# Altium PCB CoilGun_PCB.PcbDoc (part 1 of 2)
Units mm, origin at the board's own origin, x right, y up, seen from the top; angles counter-clockwise.
Board outline 78 x 72 mm, 2 copper layers (Top Layer, Bottom Layer), stack 1.594 mm thick; 79 components, 60 nets, 239 pads, 58 vias.
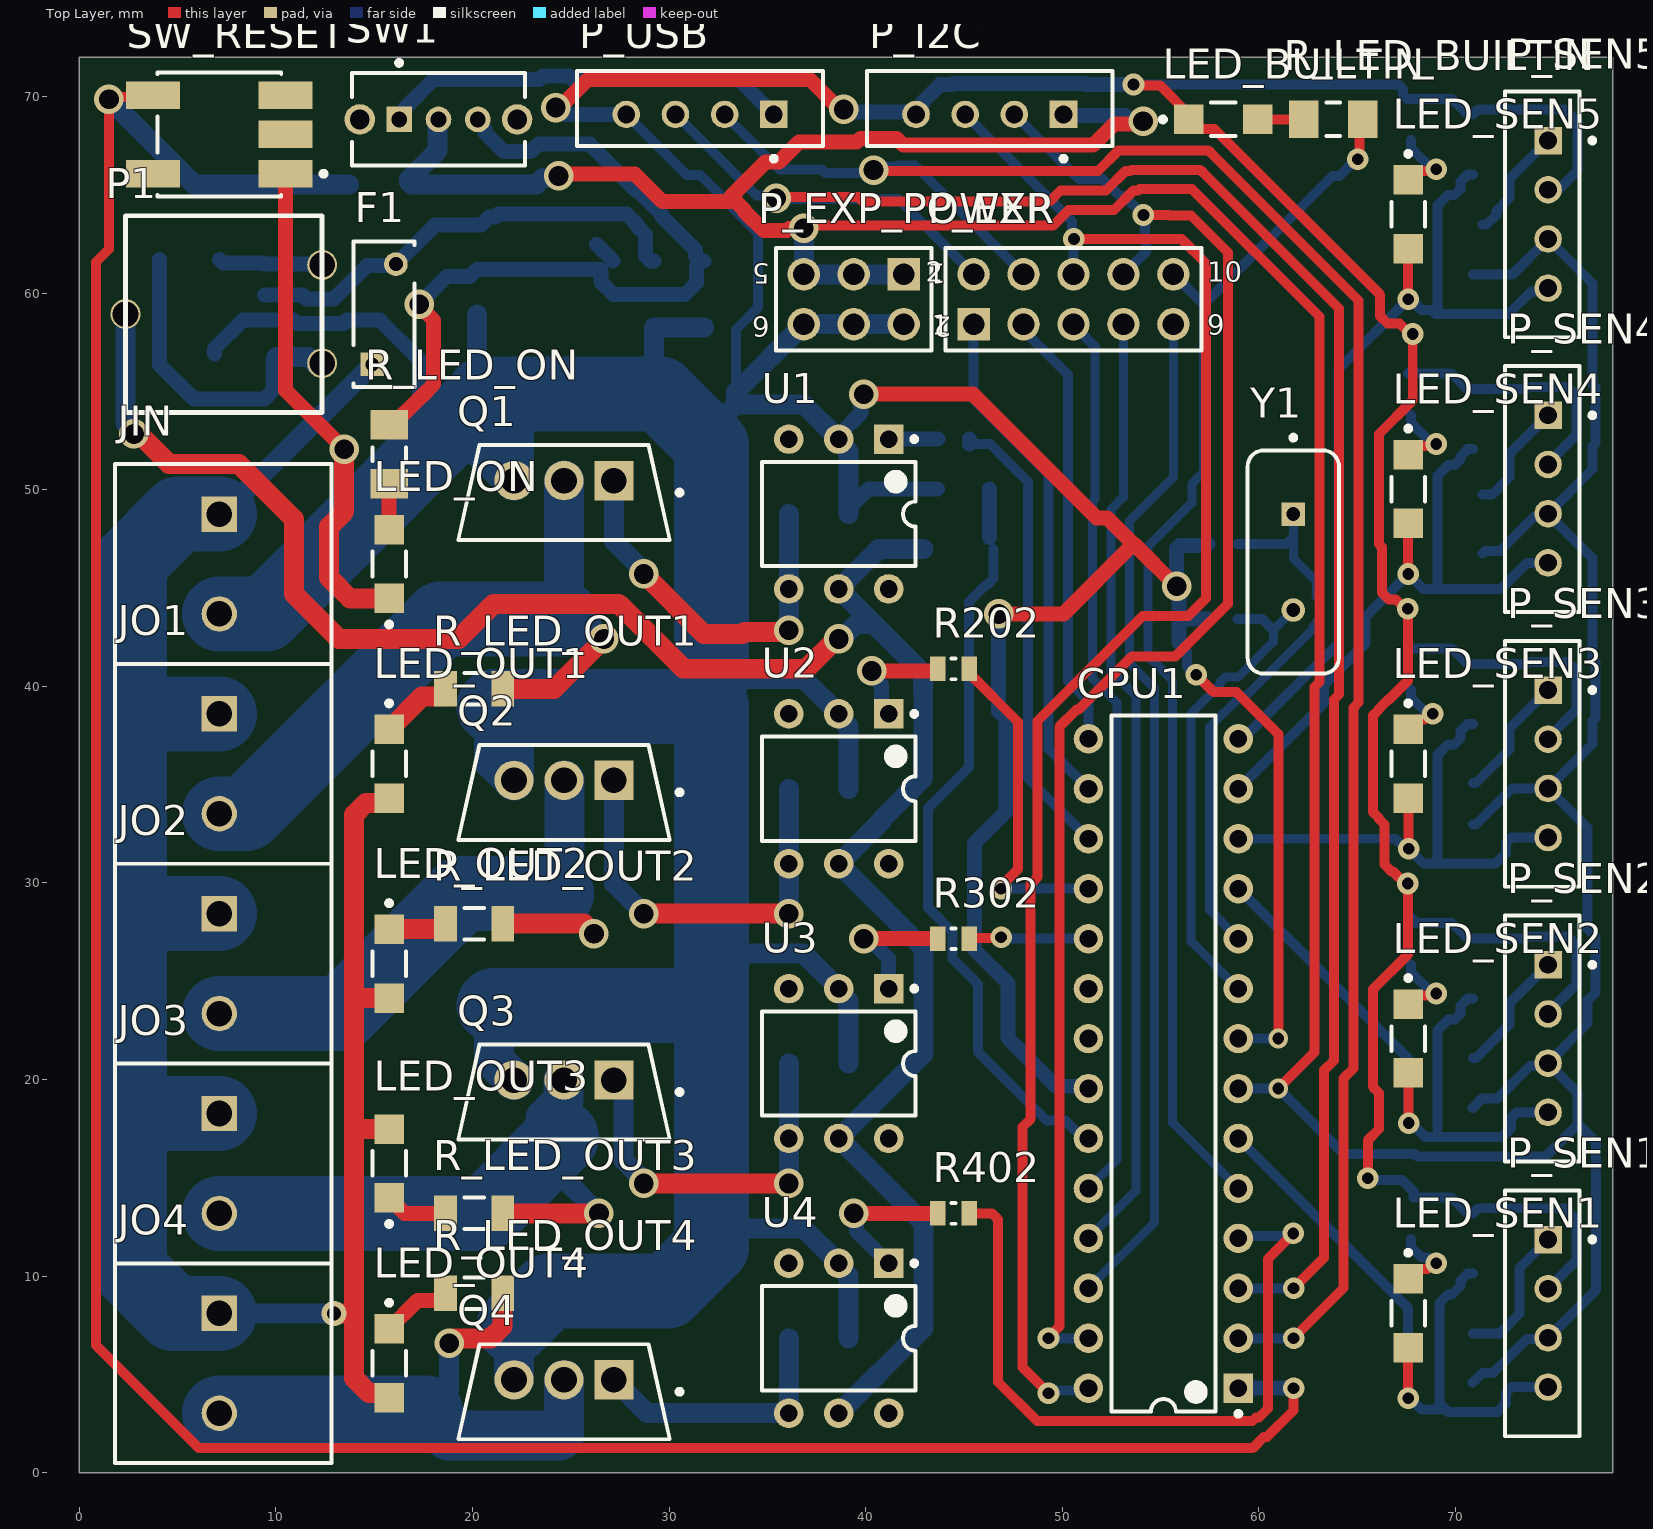
[diagram p0: Top Layer view]
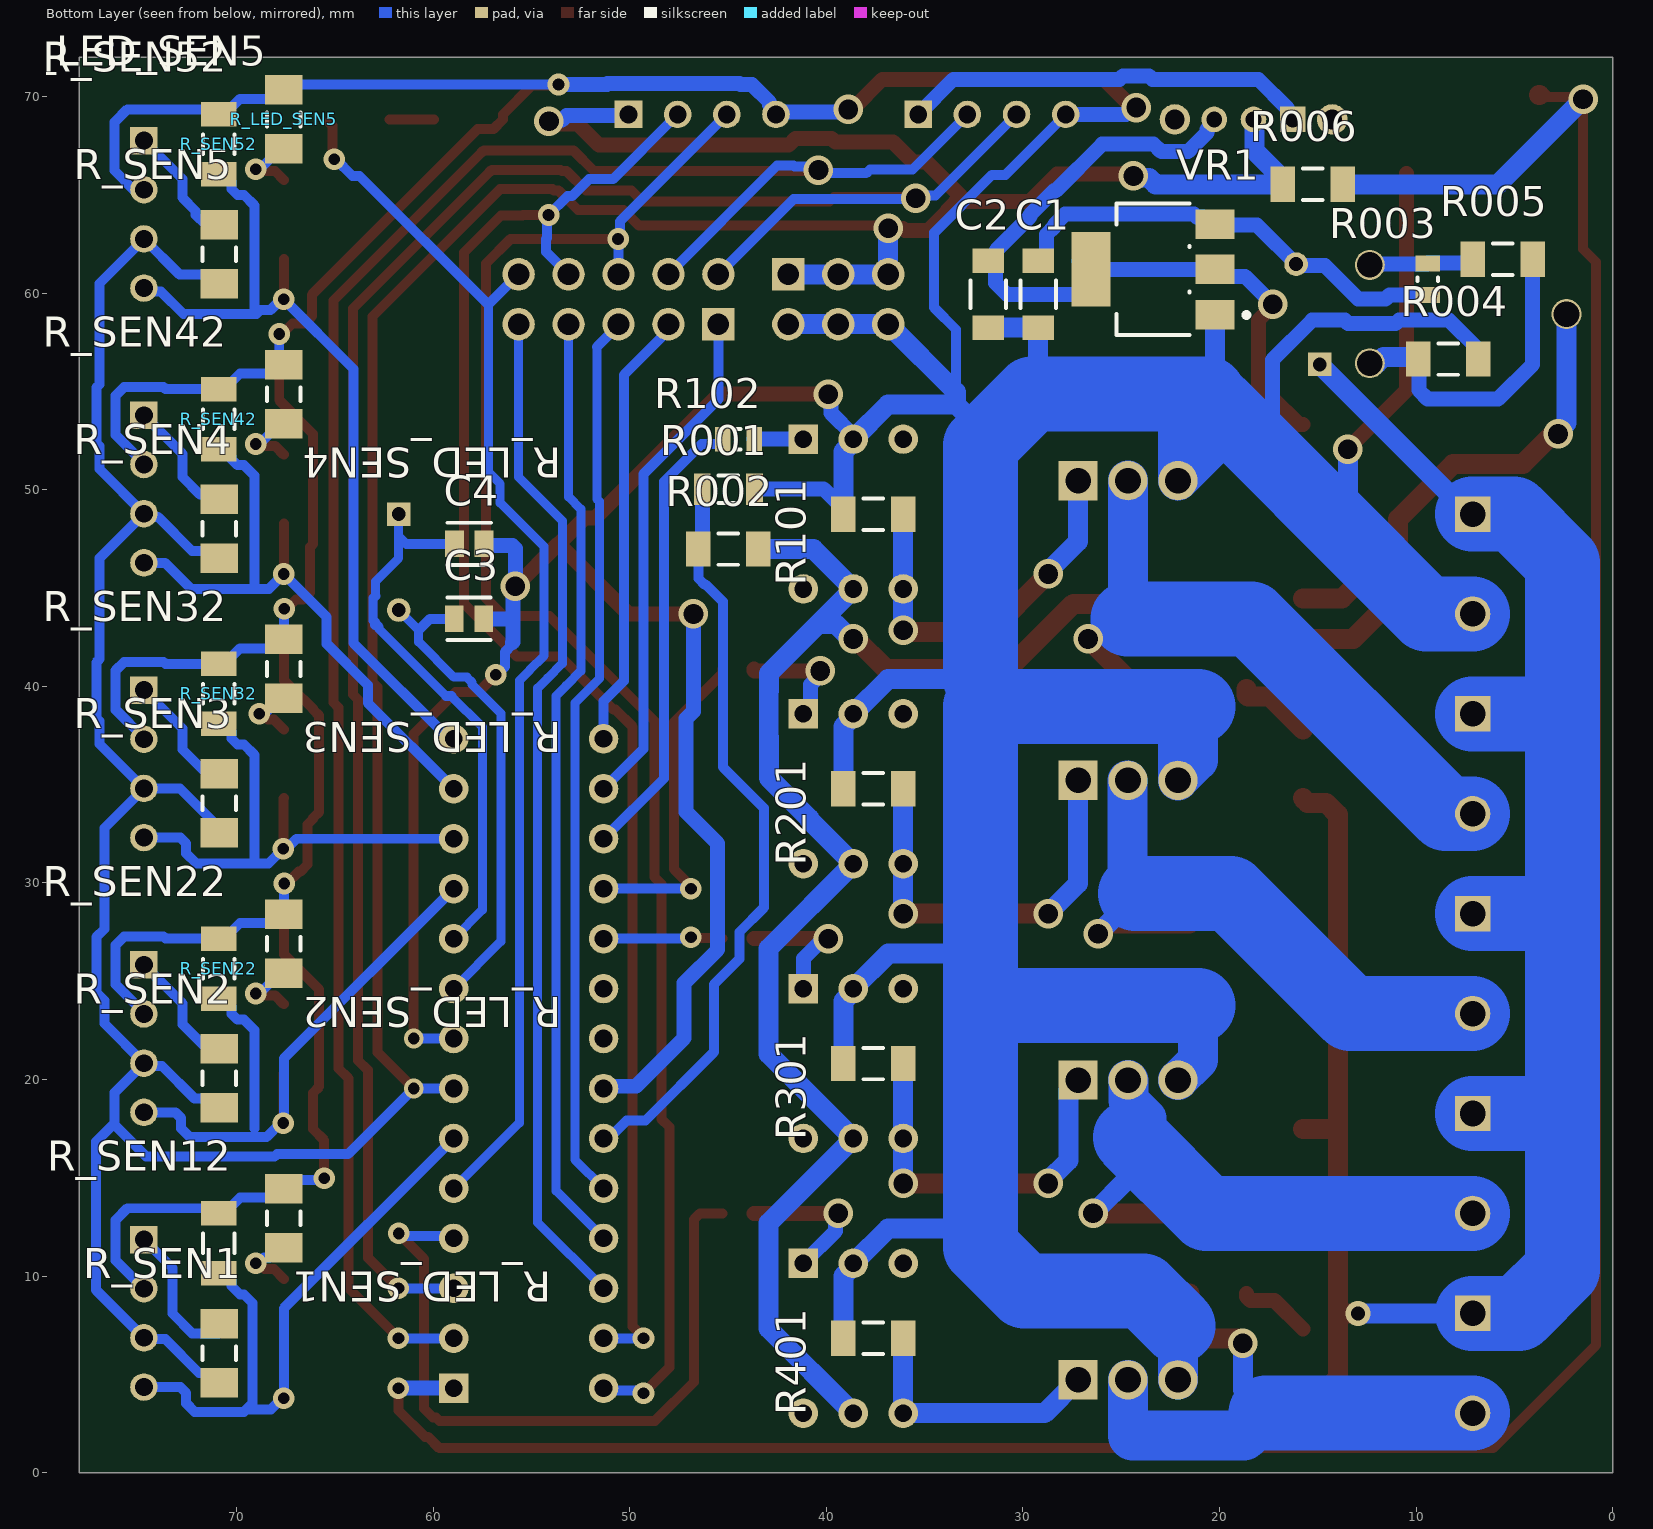
[diagram p1: Bottom Layer view, seen from below]
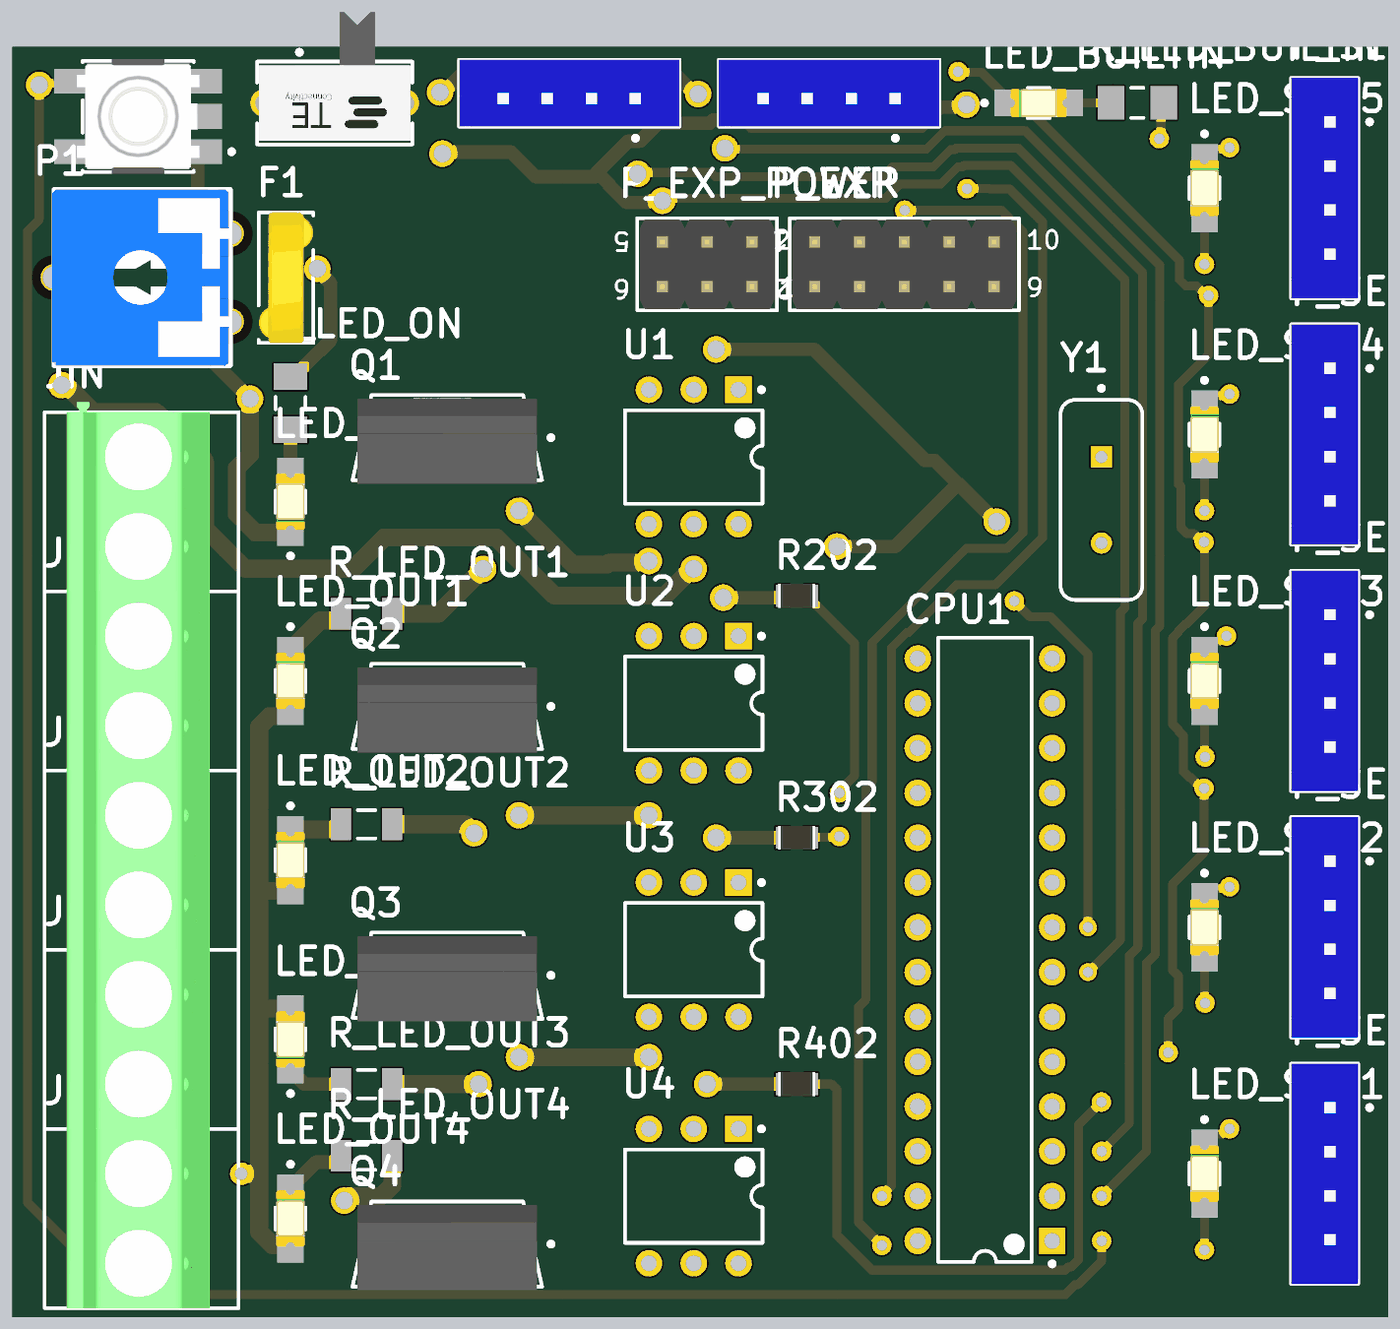
[diagram p2: 3D render of the assembled board from above, using the file's embedded part models]

## Layer stack, top to bottom
Top Layer: signal copper 0.035
Dielectric 1: core 1.524, Core-043, Dk 4.3
Bottom Layer: signal copper 0.035

## Board outline
0,0 78,0 78,72 0,72

## Design rules (kind name [scope] priority, off if disabled: settings)
Clearance [All] p1: gap=0.48 ignorepadtopadclearanceinfootprint=FALSE
PolygonConnect [All] p1: connectstyle=Relief reliefconductorwidth=0.254 reliefentries=4 polygonreliefangle="90 Angle" airgapwidth=0.254
RoutingVias [All] p1: holewidth=1 width=1.5 viastyle="Through Hole" minholewidth=1 minwidth=1.5 maxholewidth=1 maxwidth=1.5
SolderMaskExpansion [All] p1: expansion=0.102 istentingtop=FALSE
Width Width_1 [InNet('BATT')] p1: maxlimit=10.16 minlimit=0.508 preferedwidth=5.08 minimp=50.000000 maximp=50.000000 favimp=50.000000
Width [All] p2: maxlimit=5.08 minlimit=0.254 preferedwidth=0.254 minimp=50.000000 maximp=50.000000 favimp=50.000000
30 further rules are at their usual default settings.

## Components (designator, comment, footprint, x,y, rotation, side; value= is the part's Value field where it differs from the comment)
C1 "10 uF" FP-MK316L-MFG 29.232,59.936 r270 bottom
C2 "10 uF" FP-MK316L-MFG 31.772,59.936 r270 bottom
C3 "22 pF" FP-C0805C-DN-MFG 58.166,43.434 r180 bottom
C4 "22 pF" FP-C0805C-DN-MFG 58.154,47.244 r180 bottom
CPU1 "ATmega328P-PU" 28P3 55.14,20.82 r180 top
F1 "200mA" FP-MF-R030-MFG 15.516,58.92 r90 top value=0.76-1.36Ω
JIN "1729128" PHOE-1729128-2_V 7.134,46.22 r270 top
JO1 "1729128" PHOE-1729128-2_V 7.134,36.06 r270 top
JO2 "1729128" PHOE-1729128-2_V 7.134,25.9 r270 top
JO3 "1729128" PHOE-1729128-2_V 7.134,15.74 r270 top
JO4 "1729128" PHOE-1729128-2_V 7.134,5.58 r270 top
LED_BUILTIN "BLUE" FP-LTST-C150AKT-MFG 58.188,68.826 r0 top
LED_ON "GREEN" FP-LTST-C150AKT-MFG 15.77,46.22 r90 top
LED_OUT1 "BLUE" FP-LTST-C150AKT-MFG 15.77,36.06 r270 top
LED_OUT2 "BLUE" FP-LTST-C150AKT-MFG 15.77,25.9 r270 top
LED_OUT3 "BLUE" FP-LTST-C150AKT-MFG 15.77,15.74 r90 top
LED_OUT4 "BLUE" FP-LTST-C150AKT-MFG 15.77,5.58 r270 top
LED_SEN1 "BLUE" FP-LTST-C150AKT-MFG 67.586,8.12 r270 top
LED_SEN2 "BLUE" FP-LTST-C150AKT-MFG 67.586,22.09 r270 top
LED_SEN3 "BLUE" FP-LTST-C150AKT-MFG 67.586,36.06 r270 top
LED_SEN4 "BLUE" FP-LTST-C150AKT-MFG 67.586,50.03 r270 top
LED_SEN5 "BLUE" FP-LTST-C150AKT-MFG 67.586,64 r270 top
P1 "10k OHM" POT 7.366,58.928 r270 top
P_EXP "61301021121" 61301021121 50.568,59.682 r0 top
P_EXP_POWER "61300621121" 61300621121 39.392,59.682 r180 top
P_I2C "B4B-EH-A(LF)(SN)" JST-B4B-EH-A_V 46.31,69.08 r180 top
P_SEN1 "B4B-EH-A(LF)(SN)" JST-B4B-EH-A_V 74.698,8.12 r270 top
P_SEN2 "B4B-EH-A(LF)(SN)" JST-B4B-EH-A_V 74.698,22.09 r270 top
P_SEN3 "B4B-EH-A(LF)(SN)" JST-B4B-EH-A_V 74.698,36.06 r270 top
P_SEN4 "B4B-EH-A(LF)(SN)" JST-B4B-EH-A_V 74.698,50.03 r270 top
P_SEN5 "B4B-EH-A(LF)(SN)" JST-B4B-EH-A_V 74.698,64 r270 top
P_USB "B4B-EH-A(LF)(SN)" JST-B4B-EH-A_V 31.578,69.08 r180 top
Q1 "IRF1404PBF" FP-PG-TO220-3-MFG 24.66,49.851 r270 top
Q2 "IRF1404PBF" FP-PG-TO220-3-MFG 24.66,34.611 r270 top
Q3 "IRF1404PBF" FP-PG-TO220-3-MFG 24.66,19.371 r270 top
Q4 "IRF1404PBF" FP-PG-TO220-3-MFG 24.66,4.131 r270 top
R001 "4.99K OHM" RESC3116X65X40LL10T20 44.98,50.03 r0 bottom
R002 "10K OHM" RESC3116X65X40ML10T20 44.98,46.982 r180 bottom
R003 "330 OHM" RESC2013X60X35LL10T20 9.42,60.698 r90 bottom
R004 "1K OHM" RESC3116X65X40ML10T20 8.382,56.642 r0 bottom
R005 "1K OHM" RESC3116X65X40ML10T20 5.61,61.714 r0 bottom
R006 "10K OHM" RESC3116X65X40ML10T20 15.262,65.524 r0 bottom
R101 "10K OHM" RESC3116X65X40ML10T20 37.614,48.76 r180 bottom
R102 "330 OHM" RESC2013X60X35LL10T20 44.472,52.57 r0 bottom
R201 "10K OHM" RESC3116X65X40ML10T20 37.614,34.79 r180 bottom
R202 "330 OHM" RESC2013X60X35LL10T20 44.472,40.886 r0 top
R301 "10K OHM" RESC3116X65X40ML10T20 37.614,20.82 r180 bottom
R302 "330 OHM" RESC2013X60X35LL10T20 44.472,27.17 r0 top
R401 "10K OHM" RESC3116X65X40ML10T20 37.614,6.85 r180 bottom
R402 "330 OHM" RESC2013X60X35LL10T20 44.472,13.2 r0 top
R_LED_BUILTIN "120 OHM" RESC3216X70X50ML20T25 63.778,68.834 r180 top
R_LED_ON "120 OHM" RESC3216X70X50ML20T25 15.77,51.808 r90 top
R_LED_OUT1 "499 OHM" RESC1206(3216)_N 20.088,39.87 r180 top value="499.00 Ohm"
R_LED_OUT2 "499 OHM" RESC1206(3216)_N 20.088,27.932 r180 top value="499.00 Ohm"
R_LED_OUT3 "499 OHM" RESC1206(3216)_N 20.088,13.2 r180 top value="499.00 Ohm"
R_LED_OUT4 "499 OHM" RESC1206(3216)_N 20.088,9.136 r180 top value="499.00 Ohm"
R_LED_SEN1 "120 OHM" RESC3216X70X50ML20T25 67.586,12.946 r270 bottom
R_LED_SEN2 "120 OHM" RESC3216X70X50ML20T25 67.586,26.916 r270 bottom
R_LED_SEN3 "120 OHM" RESC3216X70X50ML20T25 67.586,40.886 r270 bottom
R_LED_SEN4 "120 OHM" RESC3216X70X50ML20T25 67.586,54.856 r270 bottom
R_LED_SEN5 "120 OHM" RESC3216X70X50ML20T25 67.586,68.826 r270 bottom
R_SEN1 "120 OHM" RESC3216X70X50ML20T25 70.866,6.096 r90 bottom
R_SEN2 "120 OHM" RESC3216X70X50ML20T25 70.866,20.066 r90 bottom
R_SEN3 "120 OHM" RESC3216X70X50ML20T25 70.866,34.06 r90 bottom
R_SEN4 "120 OHM" RESC3216X70X50ML20T25 70.866,48.006 r90 bottom
R_SEN5 "120 OHM" RESC3216X70X50ML20T25 70.866,61.976 r90 bottom
R_SEN12 "10K OHM" RESC3116X65X40ML10T20 70.888,11.676 r270 bottom
R_SEN22 "10K OHM" RESC3116X65X40ML10T20 70.888,25.646 r270 bottom
R_SEN32 "10K OHM" RESC3116X65X40ML10T20 70.888,39.616 r270 bottom
R_SEN42 "10K OHM" RESC3116X65X40ML10T20 70.888,53.585 r270 bottom
R_SEN52 "10K OHM" RESC3116X65X40ML10T20 70.888,67.555 r270 bottom
SW1 "1825232-1" FP-1825232-1-MFG 18.278,68.826 r0 top
SW_RESET "B3SN-3112P" FP-B3SN-3112P-MFG 7.134,68.064 r0 top
U1 "4N35" LTST-DIP-6_A 38.63,48.76 r270 top
U2 "4N35" LTST-DIP-6_A 38.63,34.79 r270 top
U3 "4N35" LTST-DIP-6_A 38.63,20.82 r270 top
U4 "4N35" LTST-DIP-6_A 38.63,6.85 r270 top
VR1 "NCP1117ST50T3G" FP-318H-MFG 23.39,61.206 r0 bottom
Y1 "FOXSLF/160-20" FOX-FOXSLF160-20 61.744,46.32 r270 top

## Footprints (in the part's own frame and the unit in brackets; to place one, negate y for a bottom-side part, rotate by r counter-clockwise, add the part's x,y. Pads: shape width x height; smd on the part's side, far side on the other; paste and mask are expansions set on the pad)
28P3 [mm] "28-Pin Plastic Dual In-Line Package (PDIP)"
  rect 1.5x1.5 hole 0.9: 1(-3.81,16.51)
  round 1.5 hole 0.9: 2(-3.81,13.97) 3(-3.81,11.43) 4(-3.81,8.89) 5(-3.81,6.35) 6(-3.81,3.81) 7(-3.81,1.27) 8(-3.81,-1.27) 9(-3.81,-3.81) 10(-3.81,-6.35) 11(-3.81,-8.89) 12(-3.81,-11.43) 13(-3.81,-13.97) 14(-3.81,-16.51) 15(3.81,-16.51) 16(3.81,-13.97) 17(3.81,-11.43) 18(3.81,-8.89) 19(3.81,-6.35) 20(3.81,-3.81) 21(3.81,-1.27) 22(3.81,1.27) 23(3.81,3.81) 24(3.81,6.35) 25(3.81,8.89) 26(3.81,11.43) 27(3.81,13.97) 28(3.81,16.51)
  silkscreen extent -3.94,-17.7 2.65,17.93, body extent -3.6,-17.65 3.6,17.65, height 4.58
61300621121 [mm] "Pin Header, pitch 2.54 mm, THT, Vertical, dual row, 6p"
  rect 1.65x1.65 hole 1.1: 1(-2.54,-1.27)
  round 1.65 hole 1.1: 2(-2.54,1.27) 3(0,-1.27) 4(0,1.27) 5(2.54,-1.27) 6(2.54,1.27)
  silkscreen extent -3.96,-2.62 3.96,2.62, body extent -3.81,-2.54 3.81,2.54, height 8.59
61301021121 [mm] "Pin Header, pitch 2.54 mm, THT, Vertical, dual row, 10p"
  rect 1.65x1.65 hole 1.1: 1(-5.08,-1.27)
  round 1.65 hole 1.1: 2(-5.08,1.27) 3(-2.54,-1.27) 4(-2.54,1.27) 5(0,-1.27) 6(0,1.27) 7(2.54,-1.27) 8(2.54,1.27) 9(5.08,-1.27) 10(5.08,1.27)
  silkscreen extent -6.5,-2.62 6.5,2.62, body extent -6.35,-2.54 6.35,2.54, height 8.59
FOX-FOXSLF160-20 [mm] "THD, 2-Leads, Body 11.35x4.65mm"
  rect 1.2x1.2 hole 0.7: 1(-2.44,0)
  round 1.2 hole 0.7: 2(2.44,0)
  silkscreen extent -6.45,-2.32 5.68,2.32, body extent -5.67,-2.32 5.68,2.33, height 3.6
FP-318H-MFG [mm]
  rect 2x1.5 smd paste+0 mask+0: 1(-3.15,2.3) 2(-3.15,0) 3(-3.15,-2.3)
  rect 2x3.8 smd paste+0 mask+0: 4(3.15,0)
  silkscreen extent -4.87,-3.35 1.85,3.35, body extent -1.85,-3.35 1.85,3.35, height 1.8
FP-1825232-1-MFG [mm]
  rect 1.3x1.3 hole 0.8 paste-1000 mask+0: 1(-2,0)
  round 1.3 hole 0.8 paste-1000 mask+0: 2(0,0) 3(2,0)
  round 1.55 hole 1 paste-1000 mask+0: 4(-4,0) 5(4,0)
  silkscreen extent -4.4,-2.35 4.4,3, body extent -4.87,-5.45 4.87,2.45, height 0.25
FP-B3SN-3112P-MFG [mm]
  rect 2.75x1.4 smd paste+0 mask+0: 1(3.375,-2) 2(-3.375,-2) 3(3.375,2) 4(-3.375,2) 5(3.375,0)
  silkscreen extent -3.15,-3.15 5.43,3.15, body extent -4.85,-3.25 4.85,3.25, height 0.25
FP-C0805C-DN-MFG [mm]
  rect 0.95x1.35 smd paste+0 mask+0: 1(-0.75,0) 2(0.75,0)
  silkscreen extent -1.1,-1.07 1.1,1.07, body extent -1,-0.63 1,0.63, height 0.88
FP-LTST-C150AKT-MFG [mm]
  rect 1.5x1.5 smd paste+0 mask+0: 1(-1.75,0) 2(1.75,0)
  silkscreen extent -3.2,-0.85 0.63,0.85, body extent -2.6,-0.95 2.6,0.95, height 0.25
FP-MF-R030-MFG [mm]
  rect 1.2x1.2 hole 0.7 paste-1000 mask+0: 1(-2.55,0.6)
  round 1.2 hole 0.7 paste-1000 mask+0: 2(2.55,-0.6)
  silkscreen extent -3.7,-1.55 3.7,1.55, body extent -3.8,-1.65 3.8,1.65, height 0.25
FP-MK316L-MFG [mm]
  rect 1.25x1.6 smd paste+0 mask+0: 1(-1.7,0) 2(1.7,0)
  silkscreen extent -0.7,-0.9 0.7,0.9, body extent -1.6,-0.8 1.6,0.8, height 1.9
FP-PG-TO220-3-MFG [mm]
  rect 2x2 hole 1.3 paste-1000 mask+0: 1(-0.61,2.54)
  round 2 hole 1.3 paste-1000 mask+0: 2(-0.61,0) 3(-0.61,-2.54)
  silkscreen extent -2.41,-5.38 2.41,6, body extent -2.51,-5.6 2.51,5.6, height 0.25
JST-B4B-EH-A_V [mm] "Header, 4-Leads, Body 12.5x3.8mm, Pitch 2.5mm"
  rect 1.4x1.4 hole 0.9: 1(-3.75,0)
  round 1.4 hole 0.9: 2(-1.25,0) 3(1.25,0) 4(3.75,0)
  silkscreen extent -6.25,-2.2 6.25,2.37, body extent -6.25,-2.2 6.25,1.6, height 6
LTST-DIP-6_A [mm] "DIP, 6-Leads, Body 7.8x7mm, Pitch 2.54mm"
  rect 1.5x1.5 hole 0.9: 1(-3.81,2.54)
  round 1.5 hole 0.9: 2(-3.81,0) 3(-3.81,-2.54) 4(3.81,-2.54) 5(3.81,0) 6(3.81,2.54)
  silkscreen extent -3.93,-3.9 2.65,3.97, body extent -3.95,-3.9 3.95,3.9, height 4.5
PHOE-1729128-2_V [mm] "Receptacle, 2-Leads, Body 8.1x10.16mm, Pitch 5.08mm"
  rect 1.8x1.8 hole 1.3: 1(-2.54,0)
  round 1.8 hole 1.3: 2(2.54,0)
  silkscreen extent -5.08,-5.3 5.08,5.7, body extent -5.65,-4.05 5.08,4.05, height 10.01
POT [mm]
  round 1.524 hole 1.3 mask+0.5: 0(2.5,5) 1(0,-5) 2(-2.5,5)
  silkscreen extent -5,-5 5,5, body extent -5,-5.1 5,5.1, height 6.16
RESC1206(3216)_N [mm] "Chip Resistor, Body 3.2x1.6mm, IPC Medium Density"
  rect 1.15x1.8 smd: 1(-1.45,0) 2(1.45,0)
  silkscreen extent -0.5,-0.8 0.5,0.8, body extent -1.67,-0.87 1.67,0.87, height 0.75
RESC2013X60X35LL10T20 [mm] "Chip Resistor, 2-Leads, Body 2.1x1.35mm, IPC High Density"
  rect 0.8x1.25 smd: 1(-0.8,0) 2(0.8,0)
  silkscreen extent -0.1,-0.53 0.1,0.53, body extent -1.05,-0.67 1.05,0.68, height 0.6
RESC3116X65X40LL10T20 [mm] "Chip Resistor, 2-Leads, Body 3.10x1.60mm, IPC High Density"
  rect 0.85x1.6 smd: 1(-1.325,0) 2(1.325,0)
  silkscreen extent -0.5,-0.7 0.5,0.7, body extent -1.6,-0.85 1.6,0.85, height 0.65
RESC3116X65X40ML10T20 [mm] "Chip Resistor, 2-Leads, Body 3.10x1.60mm, IPC Low Density"
  rect 1.25x1.8 smd: 1(-1.525,0) 2(1.525,0)
  silkscreen extent -0.5,-0.8 0.5,0.8, body extent -1.6,-0.85 1.6,0.85, height 0.65
RESC3216X70X50ML20T25 [mm] "Chip Resistor, 2-Leads, Body 3.20x1.60mm, IPC Low Density"
  rect 1.5x1.9 smd: 1(-1.5,0) 2(1.5,0)
  silkscreen extent -0.35,-0.85 0.35,0.85, body extent -1.7,-0.9 1.7,0.9, height 0.7

## Part data
C1 C2: library part CMP-2000-06325-2, "CAP CER 10UF 35V X5R 1206", Capacitance=10uF, Case Code (Imperial)=1206, Case Code (Metric)=3216, Dielectric=X5R, Max Operating Temperature=85°C, Min Operating Temperature=-55°C, Package Quantity=2000, Resistor Type=Ceramic, Tolerance=10%, Voltage Rating=35V, Case/Package=1206, Construction=Flat, Height=1.6mm, Length=3.2mm, Mount="Surface Mount", Number of Pins=2, Packaging="Tape and Reel", RoHS Compliant=Yes, Series=M, Termination=SMD/SMT, Thickness=0.071inch, Voltage Rating (DC)=35V, Width=1.6mm
C3 C4: library part CMP-03020-018552-1, "CAP CER 22PF 50V C0G/NP0 0805", Manufacturer=KEMET, Manufacturer Part Number=C0805C220J5GAC7210, Package=C0805C-DN, Temperature="-55°C to +125°C", Temperature Characteristic=C0G, Temperature Coefficient=30ppm/°C, Temperature Range High=+125°C, Temperature Range Low=-55°C, Tolerance=0.05, Voltage Rating="50 V", Automotive=No, Capacitance="22 pF", Category=Cap, ComponentLink2Description=Datasheet, ComponentLink2URL=https://content.kemet.com/datasheets/KEM_C1003_C0G_SMD.pdf, Device Class L1="Passive Components", Device Class L2=Capacitors, Device Class L3="Ceramic Capacitors", Digikey Description="CAP CER 22PF 50V C0G/NP0 0805", Height=0.88mm, Ipc Land Pattern Name=CAPC200125X78, Lead Free=Yes, Material=Ceramic, Octopart=https://octopart.com/c0805c220j5gac7210-kemet-3882539, RoHS=TRUE
CPU1: library part CMP-0095-00013-2, "8-bit AVR Microcontroller, 32KB Flash, 1KB EEPROM, 2KB SRAM, 28-pin PDIP, Industrial Grade (-40°C to 85°C)", ComponentLink1Description="Manufacturer URL", ComponentLink1URL=http://www.atmel.com/, ComponentLink2Description="ATmega48A/48PA/88A/88PA/168A/168PA/328/328P Datasheet", ComponentLink2URL=http://www.atmel.com/dyn/resources/prod_documents/8271.pdf, ComponentLink3Description="ATmega48A/48PA/88A/88PA/168A/168PA/328/328P Summary", ComponentLink3URL=http://www.atmel.com/dyn/resources/prod_documents/8271S.pdf, DatasheetVersion="revD, May-2011", PackageDescription="28-lead (0.300\"/7.62mm Wide) Plastic Dual Inline Package (PDIP)", PackageReference=28P3, PackageVersion="revB, Sep-2001", RevisionNote="DatasheetVersion updated. URLs added."
F1: library part CMP-07400-000019-1, "PTC RESET FUSE 60V 300MA RADIAL", Current Rating=40A, Hold Current=0.3A, Manufacturer="Bourns Inc.", Manufacturer Part Number=MF-R030, Resistance=0.76-1.36Ω, Temperature="-40°C to +85°C", Temperature Range High=+85°C, Temperature Range Low=-40°C, Trip Current=0.6A, Voltage Rating=60V, Automotive=No, Category=Fuse, ComponentLink2Description=Datasheet, ComponentLink2URL=https://www.bourns.com/docs/product-datasheets/mfr.pdf?sfvrsn=bc732717_36, Device Class L1="Circuit Protection", Device Class L2="PTC Resettable Fuses", Device Class L3=unset, Digikey Description="PTC RESET FUSE 60V 300MA RADIAL", Height=13.4mm, Lead Free=Yes, Mouser Description="Resettable Fuses - PPTC 60v Max 40Amps Max Hold .30 Trip .60", Octopart=https://octopart.com/mf-r030-bourns-23363, Package=MF-R030, RoHS=TRUE, Standoff Height=7.6mm, Trip Time=3s
JIN JO1 JO2 JO3 JO4: library part CMP-2000-05815-1, "PCB Terminal Block, 13.5 A, 400 V, 2-Pin THD, RoHS, Bulk", Current Rating=13500mA, Manufacturer="Phoenix Contact", Package Description="2-Pin Through Hole Device, Body 8.1 x 10.16 mm, Pitch 5.08 mm", Package Reference=1729128-2, Package Version=03/2015, Voltage Rating=400V, Datasheet URL=https://datasheet.ciiva.com/16046/1729128-16046181.pdf, Datasheet Version=12/2013, Manufacturer URL=http://www.phoenixcontact.com/, Mounting Technology=ThroughHole, No. of Positions=2, No. of Rows=1, Orientation=Horizontal, Package URL=https://www.phoenixcontact.com/online/portal/pi/pxc/product_detail_page/!ut/p/b1/3VdJjqNKFDxLH8AFycySyWY2ozFsEPOMMQaDOX1XedGL_1Vdm5YXJleknhSKeBkvI6EA8ncAo3AYoDhBQGco6KN7VURTdemj9us_IEKEZo_YHiPAEWEFmDGOHMORkqKYCORBZxgL7ZoaZYcbFFUZ3fqxSY6GOuxydWUuHqz1ynmMFygu583Bob0Ewr6Sd_l-5m-kAueHiB0jpRwZwe58wwtkpxtMYd_LmGcDRU02dRNEyWt6Y2ti5pSyJ_reIkzIulrqApdnbT11V5jnCKbYNCvhEM1MCpPByat_X379-iThf08CI5GfOPqfBeS3BRoBOdD55AKVv0iLwCMq-2BrzXWSGRH7pUGD9uwXQjiph3xL0DKQwdGa0JImiIOmBNOestqgwTHSSs2oOep-78apyXQBvNi8ZLaFjvjWvcaUEBu0MC6Wbe-d6mB0FAebo2lUWinqYaZs5DAYzV0RP9yitUjnGJ0iI9xhZkT42OCQNUJJhkgWINNQLP2JFP6OpMg3JCVg70jqHT0lvKOnhHf0lPuOnnLf0VPuWx6_dxwUIvwk5WMkT0kLL1mh61l2yZVSzG3pYV_bqo-mj6uMKwKwdnnW8Jh5RTOJzMOA5c-eJDaZQw4mTMPH02PvS_ZAqNVjVTo2WyYLkwH_KU1mmmG5kjRhDqPXLwwVHvVOjCM60-fpXvTDfMGW1PVFVS1r4e4yVDk4ZdNbkUHvqPqQSeian4UD39fNKmachqdJ1NJbyk8rXT9mXTvPk3oE5meulKGgiruPJek-4I9hTT6G8ZLOyRSm2RRVbThERQad5OS28hdt4YW4vG0stgYYzsWsK4_7y6DZMjJSCqri1kyiZR5vD7pwIrNR7QwPHTcLTI5qT7eRlpHrdGiupYlqQDJ7zy_CND8fWWBoLRXxk1RVcXiBQwbTD4Xi7KL-FuO94t9xaqweXzH, Packing=Bulk, PartNumber=1729128, Pitch=5.08mm, RoHS=TRUE
LED_BUILTIN LED_ON LED_OUT1 LED_OUT2 LED_OUT3 LED_OUT4 LED_SEN1 LED_SEN2 LED_SEN3 LED_SEN4 LED_SEN5: library part CMP-22017-000004-1, "LED AMBER CLEAR SMD", Colour=Amber, Forward Current=30mA, Forward Voltage=2.1V, Manufacturer=Lite-On, Manufacturer Part Number=LTST-C150AKT, Package=0, Power Dissipation=100mW, Reverse Voltage=5V, Temperature="-55°C to +85°C", Temperature Range High=+85°C, Temperature Range Low=-55°C, Automotive=No, Category=Diode, ComponentLink2Description=Datasheet, ComponentLink2URL=https://media.digikey.com/pdf/Data%20Sheets/Lite-On%20PDFs/LTST-C150AKT.pdf, Device Class L1=Optoelectronics, Device Class L2=LEDs, Device Class L3=unset, Digikey Description="LED AMBER CLEAR SMD", Height=1.2mm, Lead Free=Yes, Led Orientation="Top View", Luminous Intensity=6mcd, Mouser Description="Standard LEDs - SMD Amber Clear 602nm", Octopart=https://octopart.com/ltst-c150akt-lite-on-549804, Peak Emmision Wavelength=610nm, RoHS=TRUE, Viewing Angle=130°, Wavelength=602nm
P1: library part POT
P_EXP: library part CMP-1502-01084-1, "THT Vertical Pin Header WR-PHD, Pitch 2.54 mm, Dual Row, 10 pins", Contact Resistance=20mOhm, Manufacturer="Wurth Elektronik", Operating Temperature=-40to105degC, Rated Current=3A, Withstanding Voltage=500VAC, Working Voltage=250VAC, Datasheet URL=https://katalog.we-online.de/em/datasheet/6130xx21121.pdf, Gender=Male, Manufacturer URL=http://www.we-online.de, Mounting Technology=THT, Orientation=Vertical, Package Reference=61301021121, Packaging=Bag, Part Number=61301021121, Pin Number=10, Pitch=2.54mm, Publisher=WurthElektronik, Row Number=Dual
P_EXP_POWER: library part CMP-1502-01072-1, "THT Vertical Pin Header WR-PHD, Pitch 2.54 mm, Dual Row, 6 pins", Contact Resistance=20mOhm, Manufacturer="Wurth Elektronik", Operating Temperature=-40to105degC, Rated Current=3A, Withstanding Voltage=500VAC, Working Voltage=250VAC, Datasheet URL=https://katalog.we-online.de/em/datasheet/6130xx21121.pdf, Gender=Male, Manufacturer URL=http://www.we-online.de, Mounting Technology=THT, Orientation=Vertical, Package Reference=61300621121, Packaging=Bag, Part Number=61300621121, Pin Number=6, Pitch=2.54mm, Publisher=WurthElektronik, Row Number=Dual
P_I2C P_SEN1 P_SEN2 P_SEN3 P_SEN4 P_SEN5 P_USB: library part CMP-2000-05904-1, "Male Header, Pitch 2.5 mm, 1 x 4 Position, Height 6 mm, Tail Length 3.2 mm, -25 to 85 degC, RoHS, Bulk", Manufacturer=JST, Package Description="Male Header, Pitch 2.5 mm, 1 x 4 Position, Height 6 mm, Tail Length 3.2 mm", Package Reference=B4B-EH-A, Datasheet URL=http://www.jst-mfg.com/product/pdf/eng/eEH.pdf, Datasheet Version=12/2012, Manufacturer URL=http://www.jst.com/home2.html, Mounting Technology=SurfaceMount, No of Positions=4, Pitch=2.5mm, Style/Orientation=StraightHeader/Plug, Termination=Crimp, Type=ShroudedHeader
Q1 Q2 Q3 Q4: library part CMP-32901-000149-1, "MOSFET N-CH 40V 202A TO-220AB", Continuous Drain Current=202A, Drain To Source Breakdown Voltage=40V, Drain To Source Resistance=0.0035Ω, Gate To Source Voltage=20V, Input Capacitace At Vds="5669pF @ 25V", Manufacturer="Infineon Technologies", Max Forward Diode Voltage=1.5V, Max Junction Temp=+175°C, Package=PG-TO220-3, Power Dissipation=333W, Pulse Drain Current=808A, Temperature="-55°C to +175°C", Temperature Range Low=-55°C, Automotive=No, Category=Trans, ComponentLink2Description=Datasheet, ComponentLink2URL=https://www.infineon.com/dgdl/irf1404pbf.pdf?fileId=5546d462533600a4015355dae92618b0, Depletion Mode=False, Device Class L1="Discrete Semiconductors", Device Class L2=Transistors, Device Class L3=MOSFETs, Digikey Description="MOSFET N-CH 40V 202A TO-220AB", Drain To Source Voltage=40V, Footprint Url=https://www.infineon.com/dgdl/po-to220ab-fp.pdf?fileId=5546d462580663ef0158068cfbee01be, Gate Charge At Vgs="131nC @ 10V", Height=19.8mm, Lead Free=Yes, Manufacturer Part Number=IRF1404PBF, Number Of Channels=1, Number Of N Channels=1, Octopart=https://octopart.com/irf1404pbf-infineon-65873280, Reverse Recovery Charge=163nC, Reverse Recovery Time=78ns, RoHS=TRUE, Rthja Max=62°C/W, Standoff Height=3.37mm, Temperature Range High=+175°C, Threshold Vgs Max=4V, Threshold Vgs Min=2V, Transconductance=76S, Turn Off Delay Time=46ns, Turn On Delay Time=17ns
R001: library part CMP-2003-03782-1, Manufacturer=Yageo
R002 R006 R101 R201 R301 R401 R_SEN12 R_SEN22 R_SEN32 R_SEN42 R_SEN52: library part CMP-1014-00623-2, "Chip Resistor, 10 KOhm, +/- 1%, 0.25 W, -55 to 155 degC, 1206 (3216 Metric), RoHS, Tape and Reel", Case Code (Imperial)=1206, Case Code (Metric)=3216, Manufacturer=Yageo, Max Operating Temperature=155degC, Min Operating Temperature=-55degC, Package Description="2-Pin Surface Mount Device, Body 3.1 x 1.6 mm", Package Quantity=5000, Package Reference=1206.0, Power Rating=250mW, Resistance=10KOhm, Temperature Coefficient=100ppm/degreesC, Tolerance=1%, Voltage Rating=200V, Case/Package=1206, Composition=ThickFilm, Datasheet URL=http://www.yageo.com/NewPortal/yageodocoutput?fileName=/pdf/R-Chip/PYu-RC_Group_51_RoHS_L_5.pdf, Datasheet Version="Rev. 5, 10/2016", Depth=1.6mm, Height=0.55mm, Lead Free=LeadFree, Length=3.1mm, Manufacturer URL=http://www.yageo.com/, Military Standard=Not, Packaging=TapeandReel, REACH SVHC=Unknown, RoHSCompliant=true, Termination=SMD/SMT, Width=1.6mm
R003 R102 R202 R302 R402: library part CMP-2000-06960-1, "Chip Resistor, 330 Ohm, +/- 1%, 125 mW, -55 to 155 degC, 0805 (2012 Metric), RoHS, Tape and Reel", Case Code - in=0805, Case Code - mm=2012, Manufacturer=Yageo, Operating Temperature Range=-55Cto+155C, Package Description="2-Pin Surface Mounted Device, Body 2 x 1.25 mm", Power Rating=125mW(1/8W), Resistance=330Ohms, Temperature Coefficient=100PPM/C, Tolerance=1%, Voltage Rating=150V, Datasheet URL=http://www.yageo.com/documents/recent/PYu-RC_Group_51_RoHS_L_7.pdf, Datasheet Version="Rev. 7, 05/2017", Manufacturer URL=http://www.yageo.com/, Mounting Technology=SurfaceMount, Package Reference=0805, Packaging=Reel, Product=ThickFilmResistorsGeneralPurpose, Series=RC, Termination Style=SMD/SMT
R004 R005: library part CMP-2100-03674-1, "Chip Resistor, 100 KOhm, +/- 1%, 0.25 W, -55 to 155 degC, 1206 (3216 Metric), RoHS, Tape and Reel", Case Code (Imperial)=1206, Case Code (Metric)=3216, Manufacturer=Yageo, Max Operating Temperature=155degC, Min Operating Temperature=-55degC, Package Description="2-Pin Surface Mount Device, Body 3.1 x 1.6 mm", Package Reference=1206.0, Power Rating=250mW, Resistance=100KOhm, Temperature Coefficient=100ppm/degreesC, Tolerance=1%, Voltage Rating=200V, Case/Package=1206, Composition=ThickFilm, Datasheet URL=http://www.yageo.com/NewPortal/yageodocoutput?fileName=/pdf/R-Chip/PYu-RC_Group_51_RoHS_L_5.pdf, Datasheet Version="Rev. 5, 10/2016", Depth=1.6mm, Height=0.55mm, Lead Free=LeadFree, Length=3.1mm, Manufacturer URL=http://www.yageo.com/, Packaging=TapeandReel, REACH SVHC=NoSVHC, RoHSCompliant=true, Termination=SMD/SMT
R_LED_BUILTIN R_LED_ON R_LED_SEN1 R_LED_SEN2 R_LED_SEN3 R_LED_SEN4 R_LED_SEN5 R_SEN1 R_SEN2 R_SEN3 R_SEN4 R_SEN5: library part CMP-2003-04414-1, Manufacturer=Panasonic, Part Number=ERA8AEB121V
R_LED_OUT1 R_LED_OUT2 R_LED_OUT3 R_LED_OUT4: library part CMP-1014-00476-1, "499R 0.25W 1% 1206 (3216 Metric)  SMD", Case-EIA=1206, Case-Metric=3216, Power="0.25 W", Tolerance="1 %", Technology=SMT
SW1: library part CMP-03405-000001-1, "SWITCH SLIDE SPDT 200MA 30V", Contact Current Rating=0.2A, Contact Resistance=20mΩ, Manufacturer="TE Connectivity", Operating Force=200gf, Temperature="-20°C to +70°C", Temperature Range High=+70°C, Temperature Range Low=-20°C, Voltage Rating Dc=30V, Automotive=No, Category=Switch, ComponentLink2Description=Datasheet, ComponentLink2URL=https://www.te.com/commerce/DocumentDelivery/DDEController?Action=showdoc&DocId=Customer+Drawing%7F1825232%7FB2%7Fpdf%7FEnglish%7FENG_CD_1825232_B2.pdf%7F1825232-1, Device Class L1=Electromechanical, Device Class L2=Switches, Device Class L3="Slide Switches", Digikey Description="SWITCH SLIDE SPDT 200MA 30V", Electromechanical Life=10000Cycles, Height=3.7mm, Lead Free=Yes, Manufacturer Part Number=1825232-1, Mount="Through Hole", Mouser Description="Slide Switches SLIDE SWITCH SPDT Right Angle", Octopart=https://octopart.com/1825232-1-te+connectivity-45209882, Package=1825232-1, RoHS=TRUE, Throw Configuration=SPDT
SW_RESET: library part CMP-08834-000011-1, "SWITCH TACTILE SPST-NO 0.05A 24V", Case/Package=SMD/SMT, Contact Current Rating=50mA, Contact Resistance=100mR, Max Operating Temperature=70°C, Max Voltage Rating (DC)=24V, Min Operating Temperature=-20°C, Operating Force=1.57N, Package Quantity=1, Ratings=IP67, Actuator Type=Standard, Contact Material=Gold, Contact Plating=Silver, Current Rating=50mA, Depth=7mm, Electrical Life=50000Cycles, Illumination Type=Non-Illuminated, Lead Free="Lead Free", Length=6.5mm, Max Current Rating=50mA, Mechanical Life=50000Cycles, Mount="Surface Mount", Number of Poles=1, Orientation=Straight, Packaging="Tape and Reel", Radiation Hardening=No, Switch Function=Off-Mom, Switch Travel=0.25mm, Termination=SMD/SMT, Throw Configuration=SPST, Voltage Rating (DC)=24V, Weight=0.007055oz
U1 U2 U3 U4: library part CMP-2000-05615-1, "Photocoupler - Phototransistor Output, 1500 Vrms, -55 to 100 degC, 6-Pin DIP, RoHS, Tube", Current Transfer Ratio=50%, Forward Current=60mA, Isolation Voltage=5000Vrms, Manufacturer=Vishay, Maximum Collector Current=100mA, Maximum Collector Emitter Voltage=30V, Maximum Forward Diode Voltage=1.5V, Maximum Operating Temperature=+100C, Maximum Power Dissipation=70mW, Maximum Reverse Diode Voltage=6V, Minimum Operating Temperature=-55C, Package / Case=PDIP-6, Package Description="6-Pin Double In-line Package, Body 7.3 x 6.5 mm, Pitch 2.54 mm", Package Reference=DIP-6, Brand=VishaySemiconductors, Configuration=1Channel, Datasheet URL=http://optoelectronics.liteon.com/upload/download/DS-70-99-0012/S_110_4N3X%20Series%201115.pdf, Datasheet Version="Rev. D, 12/2015", Factory Pack Quantity=3000, Input Type=DC, Manufacturer URL=http://www.us.liteon.com/, Maximum Input Diode Current=60mA, Mounting Technology=ThroughHole, Number Of Channels=1Channel, Number of Channels per Chip=1Channel, Output Device=NPNPhototransistor, Output Type=DC, Packaging=Tube, Product Category=TransistorOutputOptocouplers, RoHS=Details
VR1: library part CMP-0592-00001-4, "IC REG LINEAR 5V 1A SOT223", Case/Package=SOT-223, Dropout Voltage=1.2V, Input Bias Current=6mA, Max Input Voltage=20V, Max Operating Temperature=125°C, Max Output Current=1A, Min Input Voltage=3.5V, Min Operating Temperature=0°C, Nominal Output Voltage=5V, Output Voltage Accuracy=1%, Package Quantity=1, Power Rating=781mW, Quiescent Current=10mA, Accuracy=1%, Contact Plating=Tin, Halogen Free="Halogen Free", Height=1.69mm, Lead Free="Lead Free", Length=6.7mm, Min Current Limit=1A, Number of Outputs=1, Number of Pins=4, Number of Regulators=1, Output Current=1A, Output Type=Fixed, Output Voltage=5V, Packaging="Tape and Reel", Polarity=Positive, Radiation Hardening=No, REACH SVHC="No SVHC", RoHS Compliant=Yes, Tolerance=1%, Width=3.7mm
Y1: library part CMP-1749-00003-1, "Resistance Weld Thru-Hole Crystal, 16 MHz, -20 to 70 degC, 2-Pin THD, RoHS, Bulk", Case\Package=Axial, Max Operating Temperature="155 degC", Min Operating Temperature="-55 degC", Package Quantity=200, Power Rating="250 mW", Resistance="221 kohm", Tolerance=1%, Voltage Rating="250 V", ComponentLink1Description="Manufacturer URL", ComponentLink1URL=http://www.foxonline.com/, ComponentLink2Description=Datasheet, ComponentLink2URL=http://www.foxonline.com/pdfs/hc49slf.pdf, DatasheetVersion=Mar-15, Length="0.248 inch", Mount="Through Hole", PackageDescription="2-Pin Through Hole Device, Body 11.35 x 4.65 mm", PackageReference=FOXSLF160-20, Packaging=Bulk, RoHSCompliant=true

## Via types
v1: diameter 1.5, hole 1, Top Layer to Bottom Layer, 28 vias
v2: diameter 1.1, hole 0.6, Top Layer to Bottom Layer, 27 vias
v3: diameter 1, hole 0.6, Top Layer to Bottom Layer, 2 vias
v4: diameter 1.27, hole 0.711, Top Layer to Bottom Layer, 1 vias

## Nets (pads, with @x,y where several pads share a name; then routed paths per layer and width w, separated by ;. In a path a pad name is that pad's centre, name@x,y a point inside that pad or via, vN(x,y) a via of type N, cw(c..) or ccw(c..) an arc to the next point about the centre after c; other vN are vias at no path point)
5V: CPU1.7 P_EXP_POWER.1 P_EXP_POWER.3 P_EXP_POWER.5 P_I2C.1 P_SEN1.3 P_SEN2.3 P_SEN3.3 P_SEN4.3 P_SEN5.3 R006.2 R_SEN1.1 R_SEN2.1 R_SEN3.1 R_SEN4.1 R_SEN5.1 SW1.2 | length 236.1
  Top Layer w0.508: v1(36.856,63.286) 36.994,63.424 49.523,63.424 50.323,64.224 52.632,64.224 53.611,65.203 53.848,65.203 53.923,65.278 56.6,65.278 63.078,58.8 63.078,40.223 62.822,39.967 62.822,21.39 v3(60.982,19.55)
  Top Layer w0.762: v1(24.384,65.953) 24.473,66.042 28.27,66.042 29.661,64.65 33.154,64.65 33.154,64.904 ; v1(36.856,63.286) 36.853,63.283 36.094,63.283 36,63.189 34.868,63.189 34.857,63.2 34.788,63.2 33.844,64.144 33.844,64.213 33.154,64.904 ; v1(54.102,68.738) 53.961,68.597 52.634,68.597 51.556,67.519 41.913,67.519 41.567,67.865 39.734,67.865 39.545,67.676 36.608,67.676 35.591,66.659 34.909,66.659 33.154,64.904
  Bottom Layer w0.508: CPU1.7 v3(60.982,19.55) 64.312,16.22 67.922,16.22 68.048,16.094 74.585,16.094 76.235,17.745 ; R_SEN1.1 71.362,5.092 71.894,5.092 73.608,6.806 74.634,6.806 77.123,9.295 77.123,16.857 76.2,17.78 76.2,19.338 P_SEN2.3 ; R_SEN2.1 71.354,19.054 72.14,19.054 73.786,20.7 74.558,20.7 P_SEN2.3 ; R_SEN3.1@70.888,32.978 71.038,32.978 72.87,34.81 P_SEN3.3 ; R_SEN5.1@70.888,60.952 72.9,60.952 P_SEN5.3 76.962,60.486 76.962,55.351 77.12,55.193 77.12,52.367 76.962,52.209 76.962,51.044 P_SEN4.3 ; R_SEN4.1@71.374,46.76 71.499,46.885 72.249,46.885 73.973,48.609 74.527,48.609 P_SEN4.3 ; P_SEN2.3 76.708,22.85 76.708,24.015 77.12,24.427 77.12,27.253 76.708,27.665 76.708,32.8 P_SEN3.3 ; P_SEN3.3 76.962,37.074 76.962,38.239 77.12,38.397 77.12,41.223 76.962,41.381 76.962,46.516 P_SEN4.3
  Bottom Layer w0.762: P_I2C.1@50.06,69.017 53.211,69.017 53.443,68.785 54.055,68.785 v1(54.102,68.738)
  Bottom Layer w1.016: SW1.2 18.224,68.772 18.224,67.236 16.787,65.799 16.787,65.641 16.904,65.524 23.253,65.524 23.59,65.86 24.291,65.86 v1(24.384,65.953) ; v1(36.856,63.286) 36.854,63.284 36.854,60.954 P_EXP_POWER.5 P_EXP_POWER.3 P_EXP_POWER.1
12V_F: C1.1 F1.2 R003.1 VR1.3 | length 23.4
  Bottom Layer w0.762: R003.1 11.361,59.898 11.569,59.69 12.954,59.69 14.65,61.386 16.032,61.386 18.097,63.451 20.435,63.451 20.859,63.875 21.172,63.875 21.305,64.008 27.856,64.008 28.401,63.463 28.401,63.378 28.813,62.966 28.813,61.88 29.057,61.636 C1.1
BATT: F1.1 JIN.1 JO1.1 JO2.1 JO3.1 JO4.1 LED_OUT1.2 LED_OUT2.2 LED_OUT3.2 LED_OUT4.2 | length 115.2
  Top Layer w1.016: v4(12.976,8.12) 13.992,8.12 ; LED_OUT4.2 15.528,4.072 14.738,4.072 13.992,4.818 13.992,8.12 ; LED_OUT3.2 14.02,17.49 13.992,17.518 ; LED_OUT2.2 14.091,24.15 13.992,24.249 ; LED_OUT1.2 15.528,34.068 14.587,34.068 13.992,33.473 13.992,24.249 ; 13.992,8.12 13.992,17.518 ; 13.992,17.518 13.992,24.249
  Bottom Layer w1.016: JO4.1 v4(12.976,8.12) ; JIN.1 7.526,49.152 7.698,49.152 F1.1
  Bottom Layer w3.81: JO4.1 4.794,8.12 2.562,10.352 2.562,18.28 ; JO3.1 2.562,18.28 ; JO2.1 2.689,28.44 2.562,28.567 ; JO1.1 2.562,38.6 ; JIN.1 5.048,48.76 2.562,46.274 2.562,38.6 ; 2.562,18.28 2.562,28.567 ; 2.562,28.567 2.562,38.6
GND: C1.2 C2.2 C3.2 C4.2 CPU1.8 CPU1.22 JIN.2 LED_BUILTIN.1 LED_ON.1 P_EXP_POWER.2 P_EXP_POWER.4 P_EXP_POWER.6 P_I2C.4 P_SEN1.2 P_SEN2.2 P_SEN3.2 P_SEN4.2 P_SEN5.2 P_USB.4 Q1.3 Q2.3 Q3.3 Q4.3 R001.1 R004.1 R101.1 R201.1 R301.1 R401.1 R_LED_SEN1.1 R_LED_SEN2.1 R_LED_SEN3.1 R_LED_SEN4.1 R_LED_SEN5.1 R_SEN12.1 R_SEN22.1 R_SEN32.1 R_SEN42.1 R_SEN52.1 SW_RESET.1 U1.2 U2.2 U3.2 U4.2 VR1.1 | length 549.6
  Top Layer w0.508: v2@53.662,70.558 54.96,70.558 56.438,69.08 LED_BUILTIN.1 56.934,68.33 57.74,68.33 66.162,59.908 66.162,58.82 66.534,58.448 67.149,58.448 67.685,57.912 v2(67.818,57.912) 67.818,54.55 66.102,52.834 66.102,47.226 66.242,47.086 66.242,44.77 66.601,44.411 66.962,44.411 67.431,43.942 v2(67.564,43.942) 67.586,43.92 67.586,40.306 66.574,39.294 66.532,39.294 66.102,38.864 66.102,38.822 65.786,38.506 65.786,33.614 66.102,33.298 66.102,33.256 66.382,32.976 66.382,30.934 66.741,30.575 66.828,30.575 67.431,29.972 v2(67.564,29.972) 67.564,26.356 65.786,24.578 65.786,19.644 66.102,19.328 66.102,17.488 65.532,16.918 v2(65.532,14.986) ; v2(56.807,40.591) 56.814,40.591 57.703,39.702 58.85,39.702 60.982,37.57 v3(60.982,22.09)
  Top Layer w0.762: SW_RESET.1 10.509,55.037 v1(13.484,52.062) ; v1(24.249,69.428) 24.449,69.428 25.887,70.866 37.152,70.866 38.684,69.334 v1(38.884,69.334) ; v1(39.9,54.856) 45.452,54.856 51.749,48.559 52.288,48.559 53.611,47.236 ; v1(46.756,43.68) 50.055,43.68 53.611,47.236 ; v2(53.616,70.604) v2@53.662,70.558 ; v1(55.814,45.089) 55.789,45.089 53.642,47.236 53.611,47.236
  Top Layer w1.016: v1(13.484,52.062) 13.484,48.879 12.722,48.117 12.722,45.528 13.78,44.47 LED_ON.1
  Bottom Layer w0.508: P_USB.4 30.896,66.012 31.569,66.012 34.515,63.066 34.515,59.254 33.408,58.148 33.408,54.968 ; v2(53.616,70.604) 67.078,70.604 67.331,70.351 67.331,70.072 67.527,69.876 67.586,69.876 69.817,69.876 R_SEN52.1@70.613,69.08 ; 55.966,42.22 55.966,42.12 56.351,41.735 56.351,40.996 56.756,40.591 v2(56.807,40.591) ; CPU1.8 v3(60.982,22.09) ; v2(65.532,14.986) 65.626,14.892 67.28,14.892 67.844,14.328 67.844,13.996 69.818,13.996 70.613,13.201 R_SEN12.1 71.149,13.462 75.544,13.462 76.135,12.871 76.135,10.807 P_SEN1.2 ; v2(67.564,29.972) 67.564,28.394 67.992,27.966 69.818,27.966 70.613,27.171 R_SEN22.1 73.59,27.171 73.693,27.274 75.702,27.274 76.132,26.844 76.132,24.836 74.698,23.402 P_SEN2.2 ; v2(67.564,43.942) 67.564,41.958 67.586,41.936 69.818,41.936 70.613,41.141 R_SEN32.1 73.59,41.141 73.693,41.244 75.702,41.244 76.132,40.814 76.132,38.806 74.698,37.372 P_SEN3.2 ; v2(67.818,57.912) 67.818,56.138 67.586,55.906 69.817,55.906 70.613,55.11 R_SEN42.1 73.589,55.11 73.693,55.214 75.702,55.214 76.132,54.784 76.132,52.776 74.698,51.342 P_SEN4.2 ; R_SEN52.1 71.15,69.342 75.544,69.342 76.2,68.686 76.2,66.224 75.226,65.25 P_SEN5.2
  Bottom Layer w0.762: R004.1@6.879,56.888 6.879,57.163 8.335,58.619 10.883,58.619 11.054,58.448 13.468,58.448 13.639,58.619 15.295,58.619 17.321,56.593 17.321,51.527 ; 19.732,54.65 20.088,54.294 ; v1(24.249,69.428) 24.419,69.428 24.767,69.08 P_USB.4 ; U1.2 38.63,52.77 39.759,53.898 39.759,54.715 v1(39.9,54.856) ; v1(38.884,69.334) 39.016,69.202 42.438,69.202 P_I2C.4 42.56,69.253 42.879,69.572 42.879,69.693 43.79,70.604 44.376,70.604 44.413,70.641 51.117,70.641 51.154,70.604 v2(53.616,70.604) ; R101.1@39.139,49.035 40.134,50.03 R001.1 ; v1(46.756,43.68) 46.756,38.731 47.125,38.362 47.125,33.612 45.527,32.014 45.527,26.609 47.233,24.903 47.233,22.109 49.677,19.665 51.215,19.665 CPU1.22 ; v1@55.814,45.064 55.937,44.941 55.937,43.18 ; v1(55.814,45.089) 55.814,47.02 55.966,47.172 57.332,47.172 C4.2 ; 55.966,42.22 55.937,42.249 55.937,43.18 ; C3.2 56.191,43.434 55.937,43.18
  Bottom Layer w1.016: v1(13.484,52.062) 13.484,49.522 14.4,48.606 ; VR1.1 20.24,55.212 20.596,54.856 ; 28.724,55.672 29.54,54.856 ; 29.232,55.672 C1.2 C2.2 ; 32.153,26.408 36.852,26.408 U3.2 38.63,24.499 39.139,23.99 R301.1 ; 32.153,38.981 33.538,40.366 36.864,40.366 U2.2 38.63,38.469 39.139,37.96 R201.1 ; 32.153,52.243 32.153,53.081 33.408,54.336 ; 32.788,10.86 32.153,11.495 33.084,12.426 36.864,12.426 U4.2 38.63,10.529 39.139,10.02 R401.1 ; R101.1 39.139,49.035 39.139,51.93 38.63,52.439 U1.2 36.864,54.336 33.408,54.336 ; P_EXP_POWER.2 P_EXP_POWER.4 P_EXP_POWER.6 33.408,54.968 33.408,54.336
  Bottom Layer w2.032: 20.088,54.294 20.088,52.493 Q1.3 22.12,53.332 ; 21.104,23.762 21.104,20.997 Q3.3 ; Q4.3 22.12,7.485 ; 21.104,36.237 21.104,37.965 21.104,38.981 22.12,37.965 22.12,36.237 Q2.3 21.104,36.237
  Bottom Layer w3.81: JIN.2 9.474,43.68 14.4,48.606 17.321,51.527 20.088,54.294 ; 20.596,54.856 22.12,54.856 29.54,54.856 32.153,52.243 32.153,40.366 ; 21.104,23.762 32.153,23.762 ; 21.104,38.981 32.153,38.981 32.153,26.408 32.153,23.762 ; 22.12,7.485 23.898,9.263 29.921,9.263 32.153,11.495 32.153,23.762
NetC2_1: C2.1 R_LED_ON.2 SW1.3 VR1.2 VR1.4 | length 41.1
  Top Layer w0.762: R_LED_ON.2 15.97,53.308 17.403,54.741 17.409,54.741 18.034,55.365 18.034,58.613 17.294,59.353 v1(17.294,59.428)
  Bottom Layer w0.762: v1(17.294,59.428) 18.703,60.837 19.871,60.837 VR1.2 VR1.4 26.54,60.555 27.159,59.936 30.826,59.936 31.39,60.5 31.39,61.392 C2.1@31.634,61.636 ; SW1.3 20.278,68.68 20.642,68.316 20.642,68.148 21.6,67.19 22.956,67.19 22.986,67.22 23.013,67.22 23.357,67.564 25.971,67.564 28.326,65.209 28.411,65.209 29.643,63.977 29.643,63.892 31.353,62.182 31.353,61.88 31.597,61.636 C2.1@31.634,61.636 ; VR1.4@26.319,62.476 VR1.4@27.159,61.636 ; C2.1 C2.1@31.634,61.636
NetC3_1: C3.1 CPU1.9 Y1.2 | length 24.8
  Bottom Layer w0.457: CPU1.9 56.554,27.026 56.554,38.629 58.015,40.09 58.015,40.195 58.283,40.463 58.935,40.463 60.728,42.256 60.728,42.864 Y1.2
  Bottom Layer w0.508: C3.1 60.158,43.434 60.728,42.864
NetC4_1: C4.1 CPU1.10 Y1.1 | length 28.2
  Bottom Layer w0.457: CPU1.10 57.491,28.629 57.491,37.934 59.062,39.505 59.069,39.505 ; 59.332,39.505 62.738,42.911 62.738,43.023 62.892,43.177 ; 61.343,47.236 61.744,47.637 ; Y1.1 61.744,47.637 ; 62.923,44.59 62.923,45.336 61.744,46.514 61.744,47.637 ; 63.023,44.49 63.053,44.46 63.053,43.374 63.027,43.348
  Bottom Layer w0.508: C4.1 61.335,47.244 61.343,47.236 ; 59.069,39.505 59.332,39.505 ; 62.923,44.59 63.023,44.49 ; 62.948,43.121 62.948,43.269 63.027,43.348
NetCPU1_1: CPU1.1 R006.1 SW_RESET.4 | length 147.4
  Top Layer w0.508: SW_RESET.4@3.413,70.084 3.286,69.957 1.631,69.957 v1(1.524,69.85) 1.524,62.23 0.87,61.576 0.87,6.496 6.104,1.262 59.682,1.262 60.258,1.838 60.413,1.838 61.758,3.183 v2(61.758,4.31)
  Top Layer w1.016: SW_RESET.4@3.743,70.08 SW_RESET.4
  Bottom Layer w0.762: CPU1.1 v2(61.758,4.31)
  Bottom Layer w1.016: v1(1.524,69.85) 5.85,65.524 R006.1
NetCPU1_2: CPU1.2 P_EXP.4 P_USB.2 | length 104.1
  Top Layer w0.508: v1(40.402,66.254) 40.456,66.2 51.813,66.2 52.868,67.254 57.419,67.254 57.739,66.934 65.054,59.619 65.054,39.171 64.798,38.915 64.798,20.572 64.298,20.072 64.298,9.404 61.758,6.864 v2(61.758,6.85)
  Bottom Layer w0.508: P_USB.2 35.622,66.286 37.774,66.286 37.97,66.09 40.352,66.09 v1@40.402,66.14 ; v1(40.402,66.254) 40.591,66.444 41.628,66.444 41.66,66.476 42.504,66.476 P_EXP.4 ; CPU1.2 v2(61.758,6.85)
NetCPU1_3: CPU1.3 P_EXP.2 P_USB.3 | length 104.5
  Top Layer w0.508: v1(35.455,64.811) 35.527,64.883 39.611,64.883 39.839,64.656 49.357,64.656 49.913,65.212 52.223,65.212 53.202,66.191 53.439,66.191 53.514,66.266 57.009,66.266 57.329,65.946 64.066,59.209 64.066,39.58 63.81,39.324 63.81,20.981 63.31,20.481 63.31,10.942 v2(61.758,9.39)
  Bottom Layer w0.508: P_USB.3 34.448,64.96 35.307,64.96 v1(35.455,64.811) ; v1@35.345,64.77 41.67,64.77 P_EXP.2 ; CPU1.3 v2(61.758,9.39)
NetCPU1_4: CPU1.4 R402.2 | length 37
  Top Layer w0.508: R402.2 46.434,13.2 46.736,12.898 46.736,4.632 48.716,2.652 59.675,2.652 59.849,2.826 60.004,2.826 60.452,3.274 60.452,10.892 v2(61.744,12.184)
  Bottom Layer w0.508: CPU1.4 59.077,12.057 61.617,12.057 v2(61.744,12.184)
NetCPU1_5: CPU1.5 P_EXP.10 R_LED_BUILTIN.1 | length 63.1
  Top Layer w0.508: v2(65.024,66.802) 65.118,66.896 65.118,68.524 R_LED_BUILTIN.1@65.278,68.684
  Bottom Layer w0.457: 57.189,59.411 57.189,50.901 56.585,50.297 56.585,49.332 54.356,47.103 54.356,41.557 55.104,40.808 55.104,40.802 55.614,40.292 55.614,17.806 CPU1.5
  Bottom Layer w0.508: P_EXP.10 57.189,59.411 63.73,65.952 64.09,65.952 64.94,66.802 v2(65.024,66.802)
NetCPU1_6: CPU1.6 LED_SEN1.2 P_SEN1.4 R_SEN12.2 | length 35.4
  Top Layer w0.508: v2(67.586,3.802) LED_SEN1.2
  Bottom Layer w0.508: CPU1.6 67.586,8.374 v2(67.586,3.802) 67.674,3.802 68.247,3.229 69.299,3.229 ; R_SEN12.2 70.613,10.151 70.242,9.78 70.242,9.505 69.817,9.08 69.612,9.08 69.182,8.65 69.182,3.542 69.612,3.112 72.12,3.112 72.55,3.542 72.55,4.072 72.848,4.37 P_SEN1.4
NetCPU1_11: CPU1.11 LED_SEN2.2 P_SEN2.4 R_SEN22.2 | length 34
  Top Layer w0.508: LED_SEN2.2 67.601,20.325 67.601,17.805 v2(67.616,17.79)
  Bottom Layer w0.508: CPU1.11 67.586,21.074 67.586,17.82 v2(67.616,17.79) 67.749,17.79 68.457,17.082 72.374,17.082 72.804,17.512 72.804,18.042 73.102,18.34 P_SEN2.4 ; 69.088,17.526 69.088,22.526 69.612,23.05 69.944,23.05 70.242,23.348 70.242,23.75 70.613,24.121 R_SEN22.2
NetCPU1_12: CPU1.12 LED_SEN3.2 P_SEN3.4 R_SEN32.2 | length 27.9
  Top Layer w0.508: LED_SEN3.2 67.601,34.295 67.601,31.757 v2(67.616,31.742)
  Bottom Layer w0.508: CPU1.12 66.945,32.25 67.453,31.742 v2@67.586,31.742 ; v2(67.616,31.742) 68.37,30.988 69.088,30.988 ; R_SEN32.2 70.613,38.091 70.242,37.72 70.242,37.342 69.944,37.044 69.612,37.044 69.088,36.52 69.088,30.988 ; P_SEN3.4 72.848,32.31 72.55,32.012 72.55,31.506 72.032,30.988 69.088,30.988
NetCPU1_13: CPU1.13 LED_SEN4.2 P_SEN4.4 R_SEN42.2 | length 33.2
  Top Layer w0.508: v2(67.586,45.712) LED_SEN4.2
  Bottom Layer w0.508: CPU1.13 63.316,39.156 63.316,40.075 65.404,42.163 65.404,43.53 v2(67.586,45.712) 68.34,44.958 69.088,44.958 ; R_SEN42.2 70.613,52.06 70.242,51.689 70.242,51.542 69.944,51.244 69.612,51.244 69.088,50.72 69.088,44.958 ; P_SEN4.4 73.632,46.28 72.31,44.958 69.088,44.958
NetCPU1_14: CPU1.14 LED_SEN5.2 P_SEN5.4 R_SEN52.2 | length 44.3
  Top Layer w0.508: v2(67.586,59.682) LED_SEN5.2@67.586,61.717
  Bottom Layer w0.508: CPU1.14 59.174,37.33 64.036,42.192 64.036,56.132 v2(67.586,59.682) 67.719,59.682 68.255,59.146 68.763,59.146 68.981,58.928 69.088,58.928 ; R_SEN52.2 70.613,66.03 70.242,65.659 70.242,65.282 69.944,64.984 69.612,64.984 69.088,64.46 69.088,58.928 ; P_SEN5.4 74.527,60.079 73.839,60.079 72.688,58.928 69.088,58.928
NetCPU1_15: CPU1.15 P_EXP.3 | length 22.4
  Bottom Layer w0.508: P_EXP.3 48.028,58.103 50.292,55.839 50.292,40.283 51.33,39.245 CPU1.15
NetCPU1_16: CPU1.16 P_EXP.1 | length 26
  Bottom Layer w0.508: P_EXP.1 45.488,54.602 49.304,50.786 49.304,36.816 CPU1.16
NetCPU1_17: CPU1.17 R102.2 | length 23.4
  Bottom Layer w0.508: R102.2@45.291,52.326 46.338,52.326 48.26,50.404 48.26,35.32 CPU1.17
  Bottom Layer w0.762: R102.2 45.272,52.345 R102.2@45.291,52.326
NetCPU1_18: CPU1.18 R202.2 | length 17
  Top Layer w0.508: R202.2 45.272,40.661 47.752,38.181 47.752,30.704 46.888,29.84 v2(46.888,29.71)
  Bottom Layer w0.508: v2(46.888,29.71) CPU1.18
NetCPU1_19: CPU1.19 R302.2 | length 6.1
  Top Layer w0.508: R302.2 45.307,27.205 46.853,27.205 v2(46.888,27.241)
  Bottom Layer w0.508: v2(46.888,27.241) 46.959,27.17 CPU1.19
NetCPU1_23: CPU1.23 R001.2 R002.1 | length 38
  Bottom Layer w0.508: R002.1 46.505,45.482 46.207,45.184 46.133,45.184 45.252,44.303 45.252,35.888 43.18,33.816 43.18,28.743 44.412,27.511 44.412,26.147 45.72,24.839 45.72,21.396 49.198,17.918 50.153,17.918 51.062,17.01 CPU1.23
  Bottom Layer w0.762: R002.1@46.305,47.565 R001.2
NetCPU1_24: CPU1.24 P_EXP.5 | length 45.6
  Bottom Layer w0.457: CPU1.24 52.789,15.929 52.789,39.141 52.293,39.637 52.293,39.644 51.544,40.392 51.544,49.401 51.665,49.522 51.665,57.265
  Bottom Layer w0.508: P_EXP.5 50.568,58.362 51.665,57.265
NetCPU1_25: CPU1.25 P_EXP.7 | length 48.3
  Bottom Layer w0.457: CPU1.25 53.739,14.339 53.739,39.516 53.23,40.025 53.23,40.032 52.481,40.78 52.481,49.013 53.108,49.639 P_EXP.7
NetCPU1_26: CPU1.26 P_EXP.9 | length 51.9
  Bottom Layer w0.457: CPU1.26 54.676,12.736 54.676,39.904 54.167,40.413 54.167,40.42 53.418,41.168 53.418,48.414 55.648,50.643 P_EXP.9
NetCPU1_27: CPU1.27 P_EXP.8 P_I2C.2 | length 79.4
  Top Layer w0.508: v2(49.298,6.85) 49.298,6.908 49.846,7.456 49.846,37.945 50.715,38.814 50.828,38.814 53.534,41.52 55.742,41.52 58.42,44.198 58.42,62.061 56.539,63.942 55.441,63.942 55.414,63.969 v2(54.122,63.969)
  Bottom Layer w0.508: P_I2C.2 47.765,68.875 50.853,65.787 52.069,65.787 52.933,64.923 53.168,64.923 v2(54.122,63.969) ; v2(49.298,6.85) CPU1.27 ; P_EXP.8 54.251,62.095 54.251,62.746 54.196,62.801 v2@54.196,63.66
NetCPU1_28: CPU1.28 P_EXP.6 P_I2C.3 | length 83.3
  Top Layer w0.508: v2(49.298,4.056) 47.978,5.376 47.978,17.595 48.39,18.007 48.39,29.945 48.74,30.295 48.74,38.236 54.084,43.58 56.404,43.58 57.298,44.474 57.298,61.506 56.07,62.735 50.598,62.735 v2(50.589,62.744) ; P_EXP.6 P_EXP.6@50.877,60.952
  Bottom Layer w0.508: P_I2C.3 50.494,63.646 50.494,62.839 v2(50.589,62.744) ; v2(49.298,4.056) 49.425,4.183 51.203,4.183 CPU1.28 ; P_EXP.6 50.578,60.962 50.578,62.755 v2@50.568,62.766
NetJO1_2: JO1.2 Q1.2 R_LED_OUT1.1 | length 37.3
  Top Layer w1.016: R_LED_OUT1.1 24.152,39.87 v1(26.692,42.41)
  Bottom Layer w1.016: 24.66,43.426 25.545,43.426 26.561,42.41 v1(26.692,42.41)
  Bottom Layer w2.032: 24.66,43.426 Q1.2
  Bottom Layer w3.81: JO1.2 8.499,33.52 18.405,43.426 24.66,43.426
NetJO2_2: JO2.2 Q2.2 R_LED_OUT2.1 | length 33.3
  Top Layer w1.016: R_LED_OUT2.1 25.676,27.932 v1(26.184,27.424)
  Bottom Layer w1.016: 24.279,29.456 24.279,29.329 v1(26.184,27.424)
  Bottom Layer w2.032: 24.279,29.456 24.676,29.853 Q2.2@24.676,35.221
  Bottom Layer w3.81: JO2.2 13.357,23.36 19.453,29.456 24.279,29.456
NetJO3_2: JO3.2 Q3.2 R_LED_OUT3.1 | length 31.9
  Top Layer w1.016: R_LED_OUT3.1 v1(26.438,13.2)
  Bottom Layer w1.016: 24.545,16.256 24.545,15.093 v1(26.438,13.2)
  Bottom Layer w2.032: 23.729,16.256 23.729,18.038 24.632,18.94 24.632,19.953 Q3.2
  Bottom Layer w3.81: JO3.2 20.673,13.2 24.545,17.071
NetJO4_2: JO4.2 Q4.2 R_LED_OUT4.1 | length 29.5
  Top Layer w1.016: v1(18.818,6.596) 19.072,6.85 20.943,6.85 21.538,7.445 R_LED_OUT4.1
  Bottom Layer w1.016: 17.634,3.04 18.818,4.224 v1(18.818,6.596)
  Bottom Layer w2.032: 24.406,1.897 24.66,2.151 Q4.2
  Bottom Layer w2.54: 17.634,3.04 18.777,1.897 24.406,1.897
  Bottom Layer w3.81: JO4.2 17.634,3.04
NetLED_BUILTIN_2: LED_BUILTIN.2 R_LED_BUILTIN.2 | length 2.3
  Top Layer w0.508: LED_BUILTIN.2 R_LED_BUILTIN.2@62.218,68.826
NetLED_ON_2: LED_ON.2 R_LED_ON.1 | length 2.3
  Top Layer w0.762: LED_ON.2 R_LED_ON.1
NetLED_OUT1_1: LED_OUT1.1 R_LED_OUT1.2 | length 3.9
  Top Layer w1.016: LED_OUT1.1 17.449,39.489 18.571,39.489 18.638,39.556 R_LED_OUT1.2
NetLED_OUT2_1: LED_OUT2.1 R_LED_OUT2.2 | length 3
  Top Layer w0.762: R_LED_OUT2.2@18.444,27.65 18.638,27.844 R_LED_OUT2.2
  Top Layer w1.016: LED_OUT2.1 R_LED_OUT2.2@18.444,27.65
NetLED_OUT3_1: LED_OUT3.1 R_LED_OUT3.2 | length 3.2
  Top Layer w0.762: LED_OUT3.1 16.56,13.2 R_LED_OUT3.2
NetLED_OUT4_1: LED_OUT4.1 R_LED_OUT4.2 | length 3.7
  Top Layer w0.762: LED_OUT4.1 17.217,8.777 18.444,8.777 18.638,8.971 R_LED_OUT4.2
NetLED_SEN1_1: LED_SEN1.1 R_LED_SEN1.2 | length 3.8
  Top Layer w0.508: LED_SEN1.1 68.082,10.366 68.573,10.366 68.875,10.668 v2(69.008,10.668)
  Bottom Layer w0.508: R_LED_SEN1.2@67.736,11.896 67.736,11.496 68.282,10.95 68.593,10.95 68.875,10.668 v2(69.008,10.668)
NetLED_SEN2_1: LED_SEN2.1 R_LED_SEN2.2 | length 3.8
  Top Layer w0.508: LED_SEN2.1 68.036,24.29 68.914,24.29 v2(69.008,24.384)
  Bottom Layer w0.508: R_LED_SEN2.2@67.736,25.866 67.736,25.466 68.724,24.478 68.914,24.478 v2(69.008,24.384)
NetLED_SEN3_1: LED_SEN3.1 R_LED_SEN3.2 | length 3.4
  Top Layer w0.508: LED_SEN3.1 68.082,38.306 68.399,38.306 68.701,38.608 v2(68.834,38.608)
  Bottom Layer w0.508: R_LED_SEN3.2@67.736,39.836 67.736,39.436 68.47,38.702 68.74,38.702 v2(68.834,38.608)
NetLED_SEN4_1: LED_SEN4.1 R_LED_SEN4.2 | length 3.8
  Top Layer w0.508: LED_SEN4.1 68.036,52.23 68.914,52.23 v2(69.008,52.324)
  Bottom Layer w0.508: R_LED_SEN4.2@67.736,53.806 67.736,53.406 68.724,52.418 68.914,52.418 v2(69.008,52.324)
NetLED_SEN5_1: LED_SEN5.1 R_LED_SEN5.2 | length 3.8
  Top Layer w0.508: LED_SEN5.1 68.036,66.2 68.914,66.2 v2(69.008,66.294)
  Bottom Layer w0.508: R_LED_SEN5.2@67.736,67.776 67.736,67.376 68.724,66.388 68.914,66.388 v2(69.008,66.294)
NetP1_0: P1.0 R004.2 R005.1 | length 15.9
  Bottom Layer w0.762: R005.1 4.085,56.367 5.842,54.61 9.429,54.61 9.875,55.056 9.875,56.61 R004.2
  Bottom Layer w1.016: R004.2@10.046,56.75 11.667,56.75 11.997,56.42 P1.0@12.134,56.42
NetP1_1: P1.1 R002.2 U1.5 U2.5 U3.5 U4.5 | length 111.2
  Top Layer w1.016: v1(2.794,52.832) 3.062,52.832 4.586,51.308 8.128,51.308 10.922,48.514 10.922,44.704 13.208,42.418 19.305,42.418 21.083,44.196 27.443,44.196 30.745,40.894 36.983,40.894 38.499,42.41 v1(38.63,42.41)
  Bottom Layer w1.016: P1.1 2.366,53.391 2.794,52.963 v1(2.794,52.832) ; U4.5 42.936,7.346 42.936,12.704 U3.5 42.936,21.316 42.936,26.674 U2.5 40.862,33.212 40.862,33.283 42.926,35.347 42.926,37.43 42.928,37.432 42.928,39.768 42.926,39.77 42.926,40.654 40.408,43.172 ; v1(38.63,42.41) 38.761,42.41 39.523,43.172 40.408,43.172 ; R002.2@42.947,46.982 40.662,46.982 U1.5 40.408,43.172
NetP1_2: P1.2 R003.2 R005.2 | length 5.1
  Bottom Layer w0.762: R005.2 7.332,61.517 9.401,61.517 R003.2 9.439,61.479 12.075,61.479 P1.2@12.134,61.42
NetP_SEN1_1: P_SEN1.1 R_SEN1.2 | length 7.1
  Bottom Layer w0.508: R_SEN1.2@70.888,7.104 72.25,7.104 73.251,8.105 73.251,10.423 P_SEN1.1
NetP_SEN2_1: P_SEN2.1 R_SEN2.2 | length 6.4
  Bottom Layer w0.508: R_SEN2.2@70.888,21.108 71.038,21.108 72.743,22.813 72.743,23.885 P_SEN2.1
NetP_SEN3_1: P_SEN3.1 R_SEN3.2 | length 6.4
  Bottom Layer w0.508: R_SEN3.2@70.888,35.078 71.038,35.078 72.743,36.783 72.743,37.855 P_SEN3.1
NetP_SEN4_1: P_SEN4.1 R_SEN4.2 | length 5.7
  Bottom Layer w0.508: R_SEN4.2@71.374,49.76 71.858,49.76 72.743,50.645 72.743,51.825 P_SEN4.1
NetP_SEN5_1: P_SEN5.1 R_SEN5.2 | length 5.8
  Bottom Layer w0.508: R_SEN5.2@71.374,63.476 71.574,63.476 72.07,63.972 72.07,64.172 72.743,64.845 72.743,65.795 P_SEN5.1
NetP_USB_1: P_USB.1 SW1.1 | length 20.9
  Bottom Layer w0.762: SW1.1 16.547,69.095 16.547,69.379 18.034,70.866 23.409,70.866 23.582,71.039 24.916,71.039 25.089,70.866 33.542,70.866 P_USB.1
NetQ1_1: Q1.1 R101.2 U1.4 | length 20